# Allegro board autohood_teamschematic_v1.brd
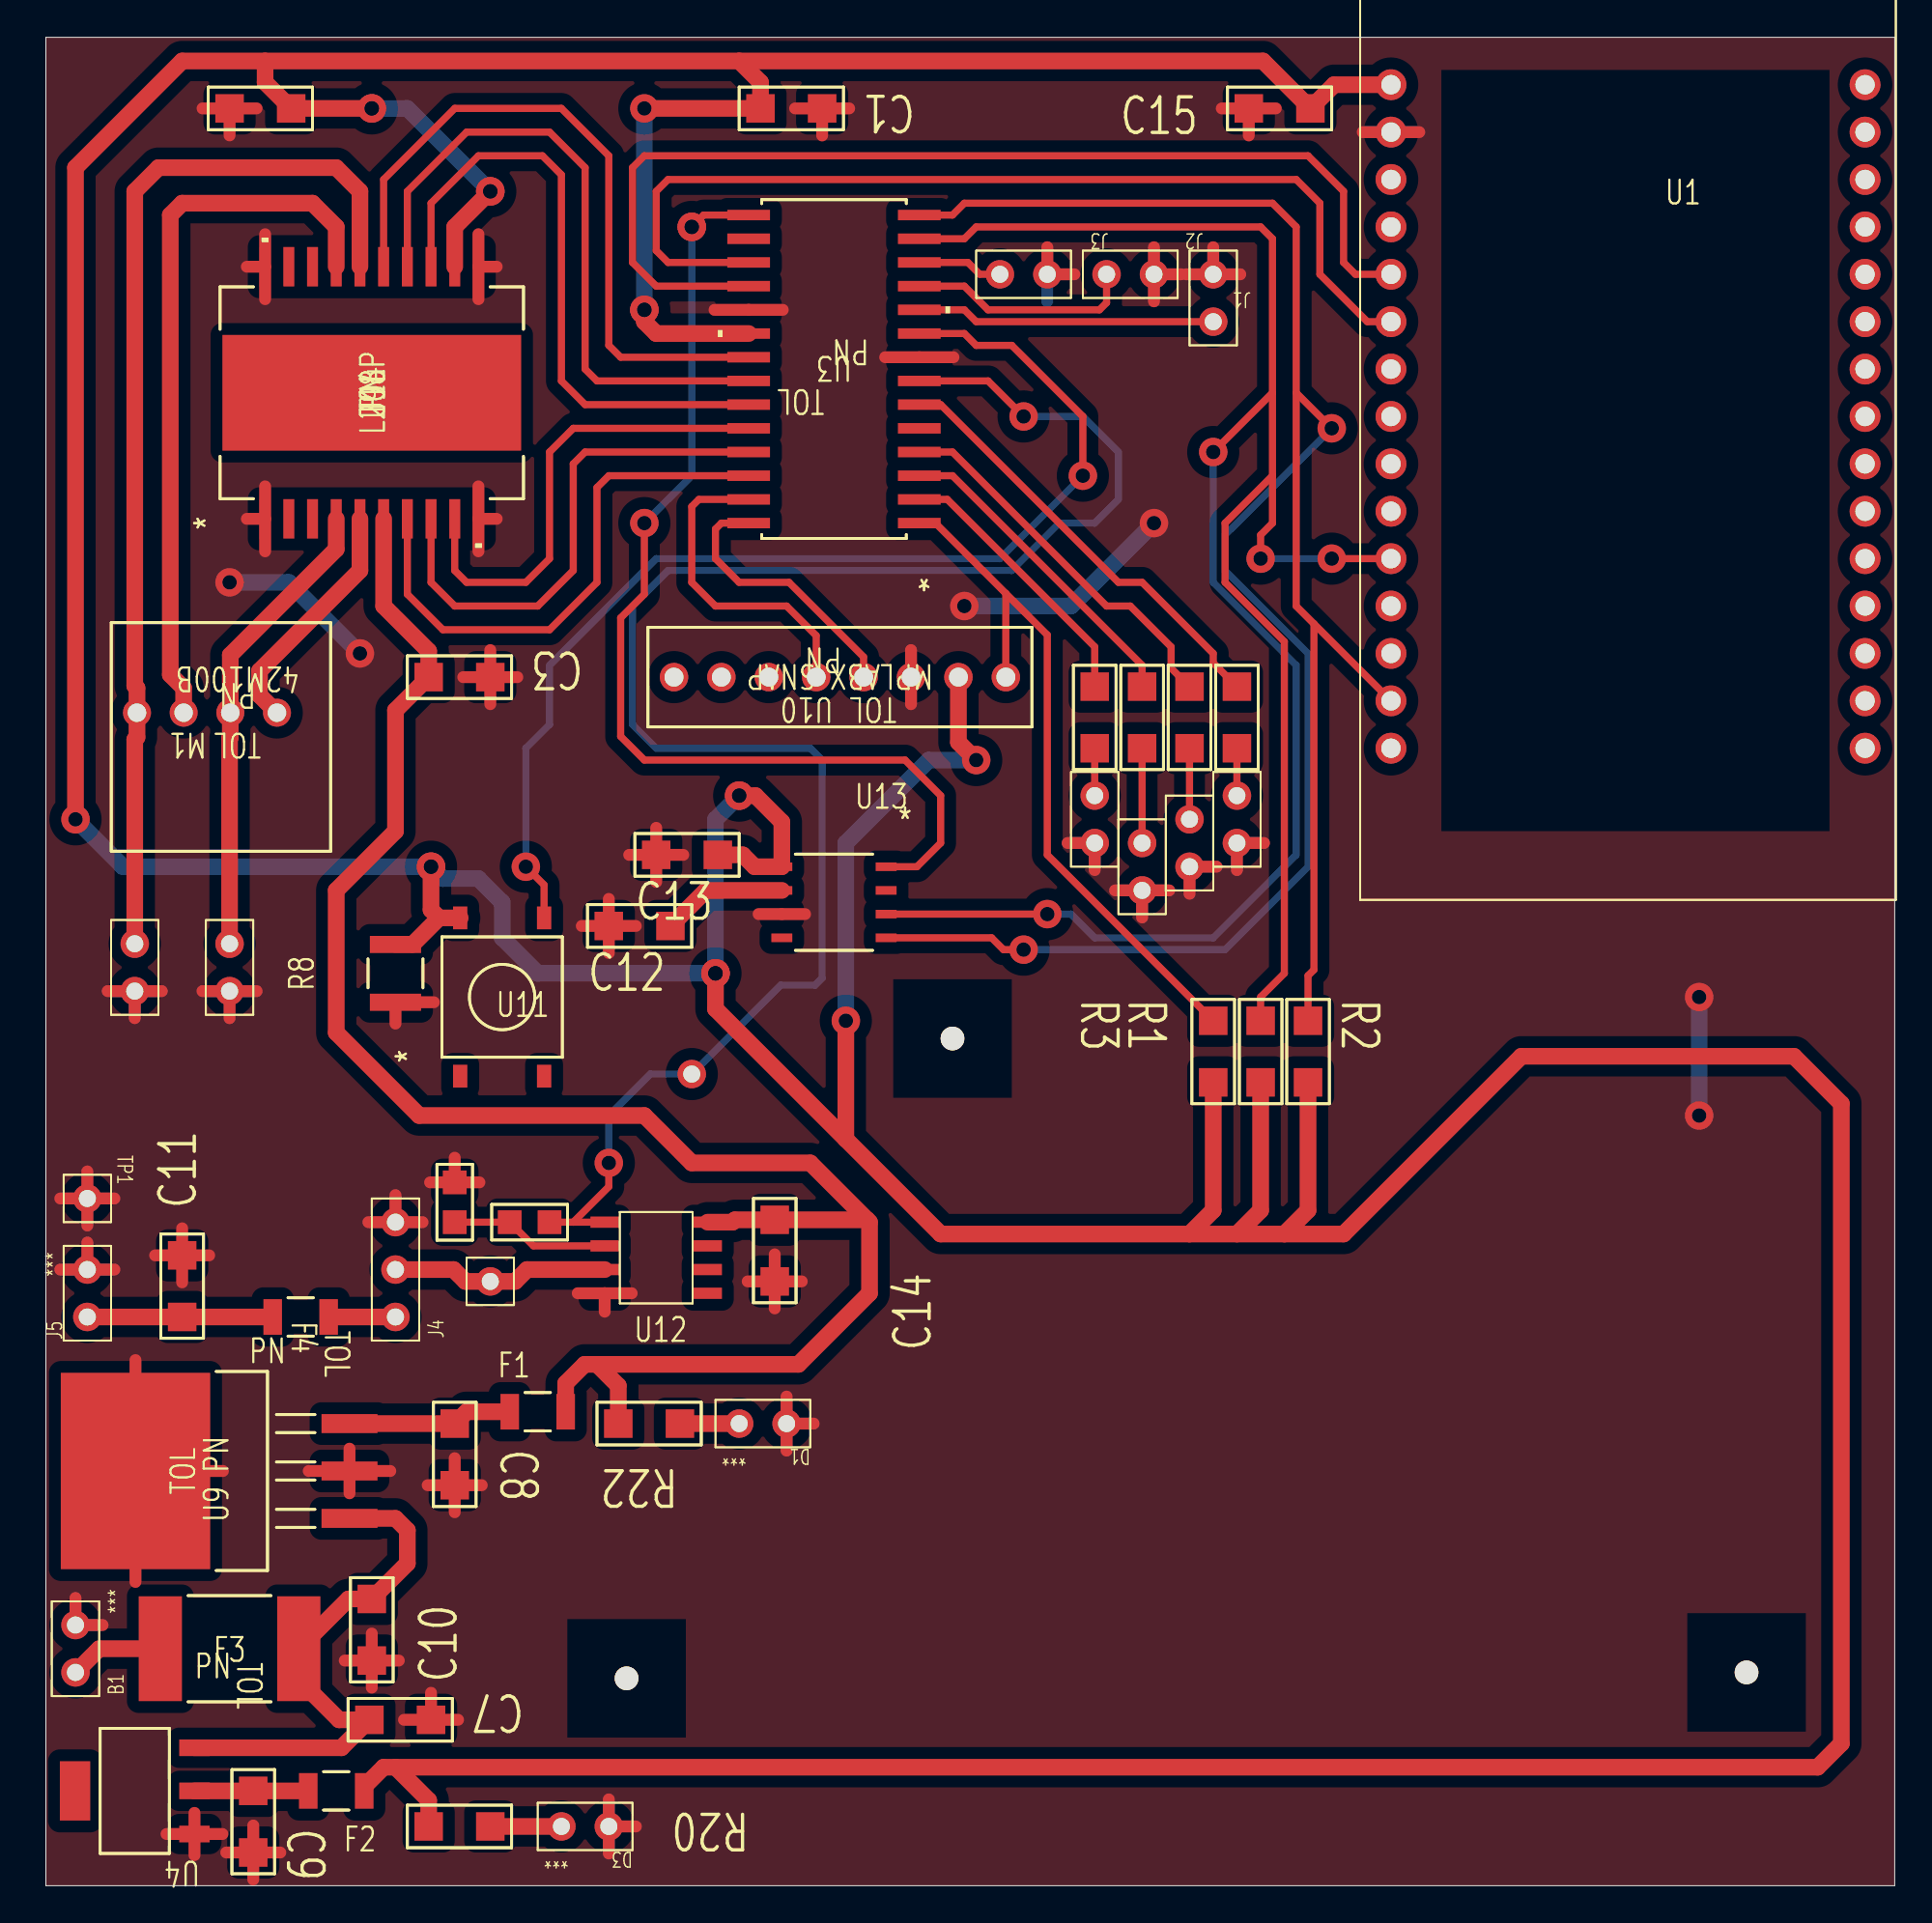
[diagram p0: board, top side]
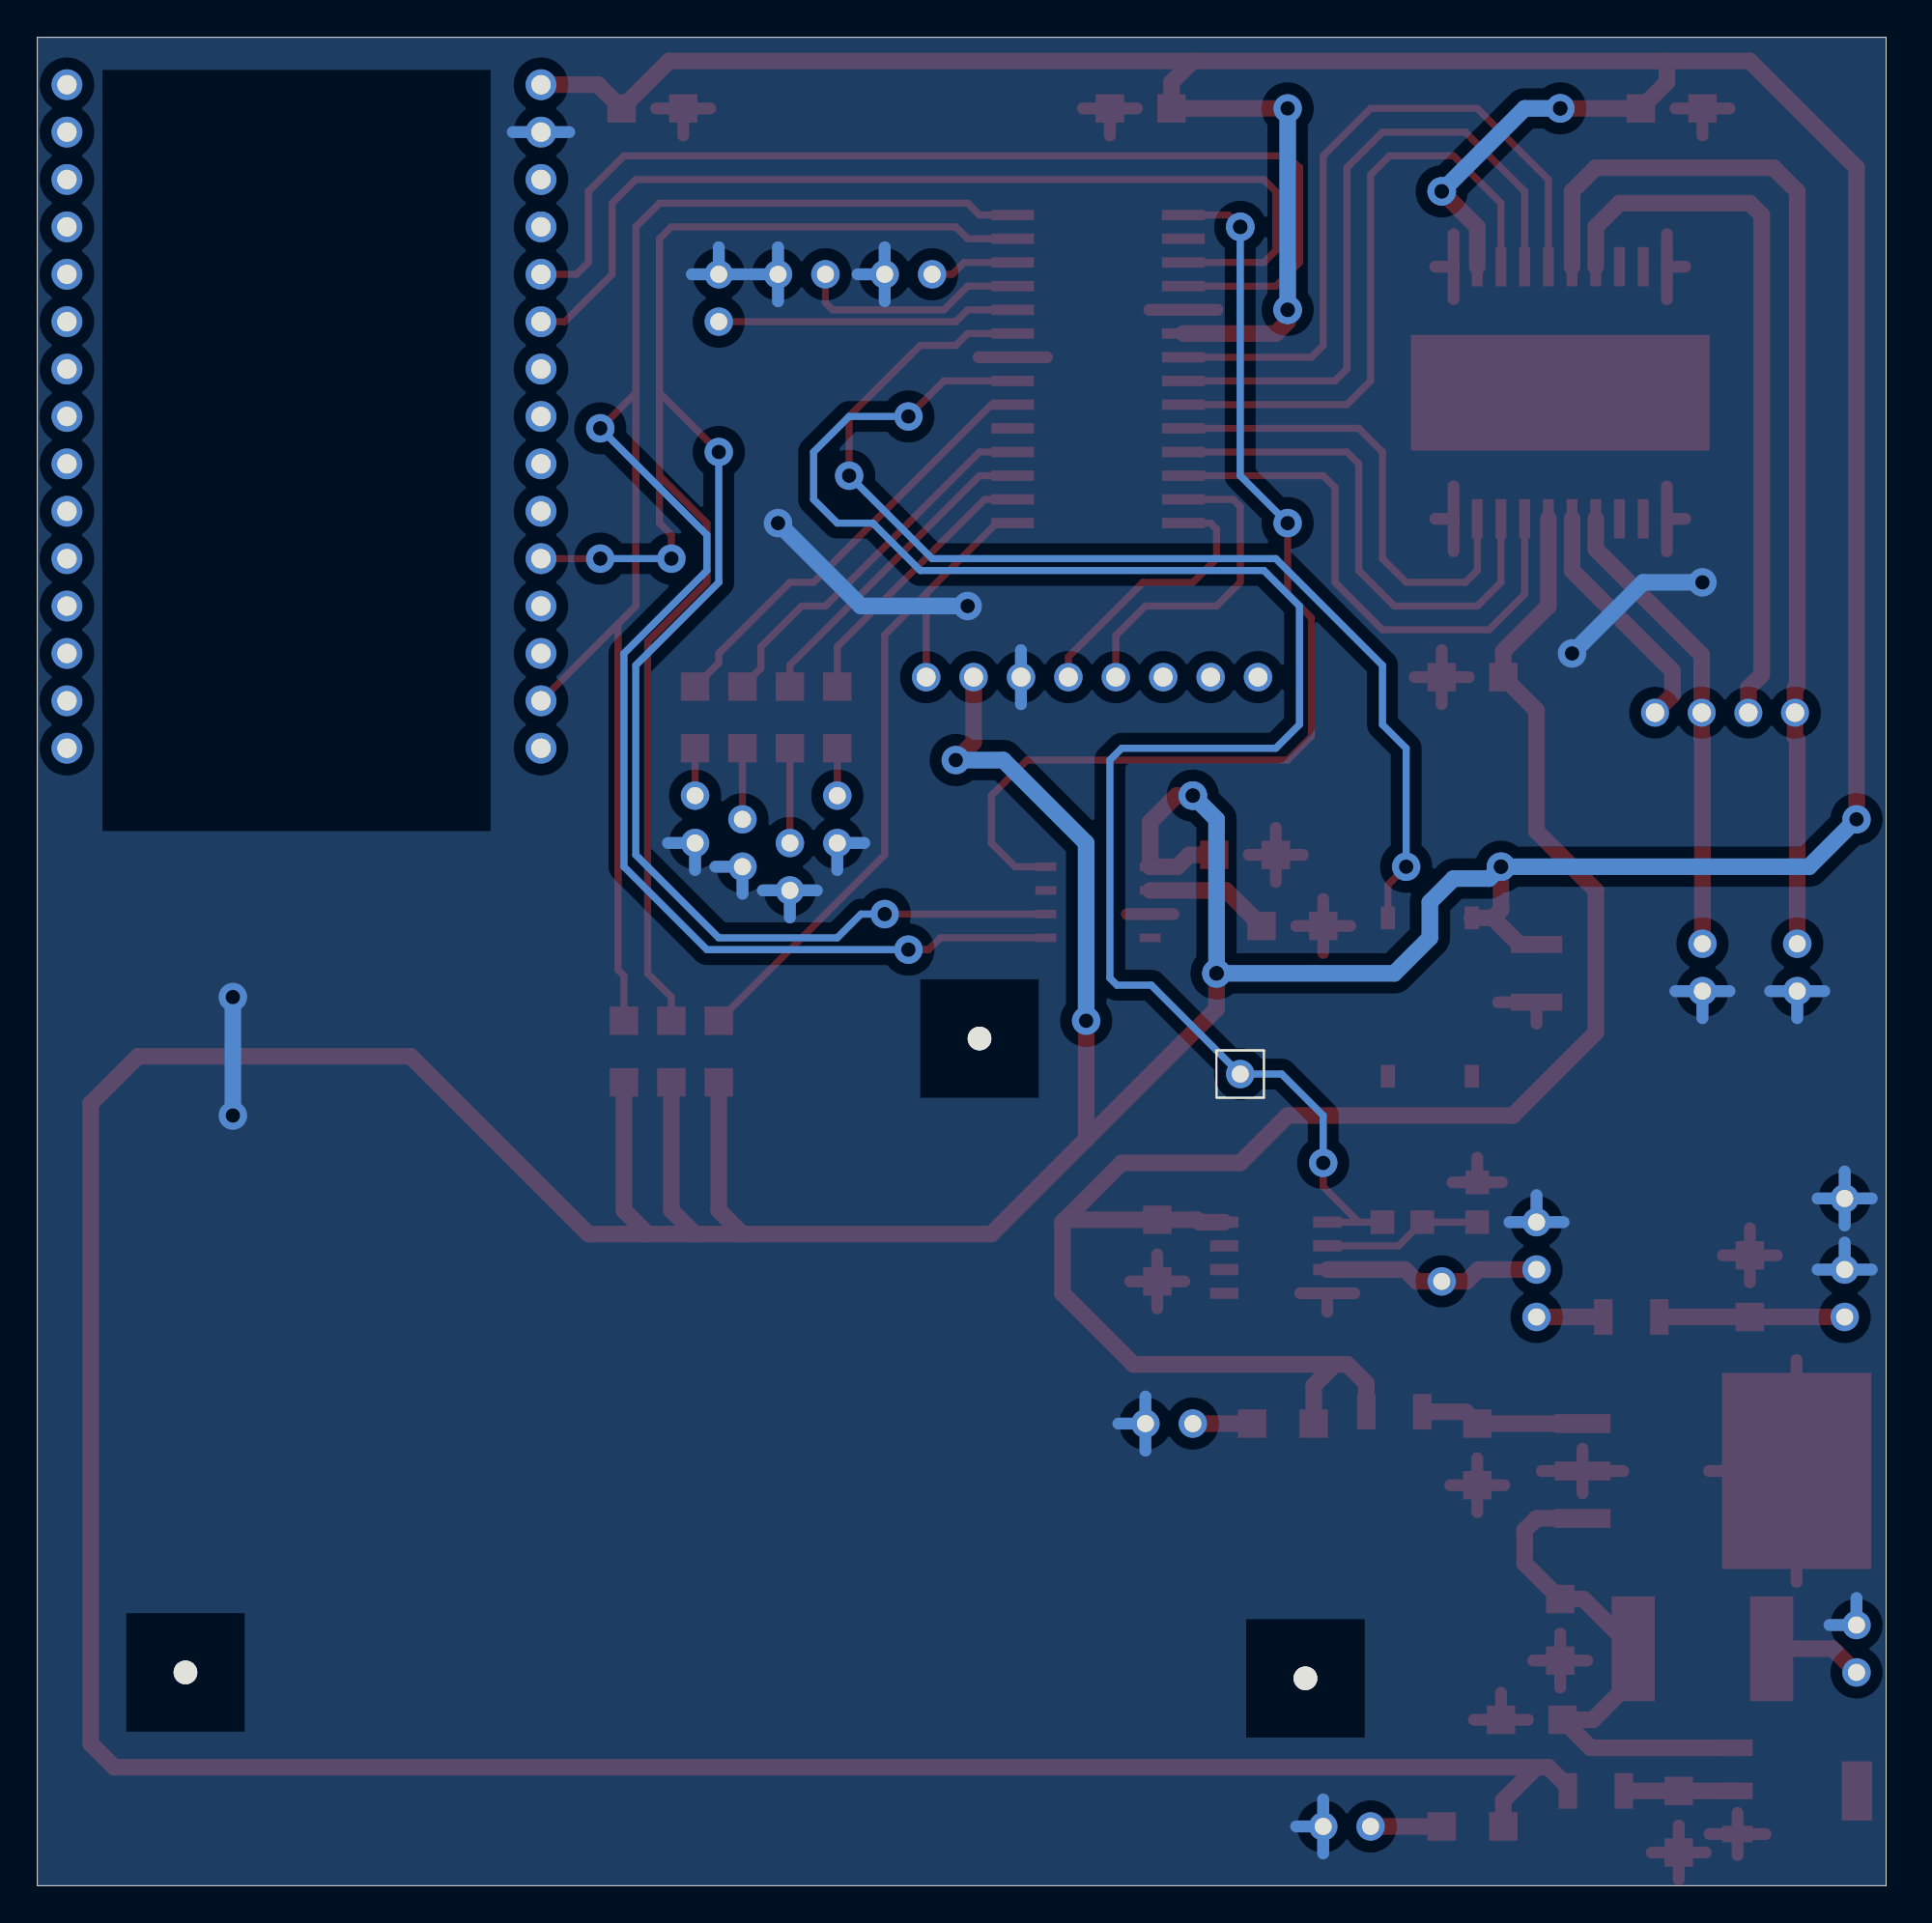
[diagram p1: board, bottom side, seen from below]

Outline 99.06 x 99.06 mm; copper layers: TOP, BOTTOM. Coordinates in mm from the lower left corner of the outline.
Outline path: 0,99.06 0,0 99.06,0 99.06,99.06 0,99.06

## Design rules (mm)
constraint set DEFAULT: min track width 0.127

## Placement (name value [footprint] x y rotation side)
B1  ASR00050  [JUMPER2]  1.59 11.43 90 top
C1  1 uF  [SMC1206]  41.59 95.25 180 top
C3  1 uF  [SMC1206]  23.81 64.77 180 top
C4  1 uF  [SMC1206]  9.84 95.25 0 top
C7  1 uF  [SMC1206]  20.64 8.89 180 top
C8  1 uF  [SMC1206]  21.91 24.76 270 top
C9  1 uF  [SMC1206]  11.11 5.08 270 top
C10  1 uF  [SMC1206]  17.46 12.06 90 top
C11  1 uF  [SMC1206]  7.3 30.48 90 top
C12  0.1uF  [SMC1206]  30.16 51.43 0 top
C13  0.22uF  [SMC1206]  32.7 55.24 0 top
C14  1 uF  [SMC1206]  39.05 32.38 90 top
C15  1 uF  [SMC1206]  64.45 95.25 0 top
D1  LED  [JUMPER2]  39.69 24.76 180 top
D2  LED  [JUMPER2]  63.82 55.88 90 top
D3  LED  [JUMPER2]  30.16 3.17 180 top
D4  LED  [JUMPER2]  56.2 55.88 90 top
D5  LED  [JUMPER2]  58.74 53.34 90 top
D7  LED  [JUMPER2]  61.28 54.61 90 top
D8  DIODE  [JUMPER2]  4.76 50.48 270 top
D9  DIODE  [JUMPER2]  9.84 50.48 270 top
F1  1.5A PTC Fuse  [0ZCJ_BEL]  26.35 25.4 0 top
F2  1.5A PTC Fuse  [0ZCJ_BEL]  15.56 5.08 0 top
F3  2.5A PTC Fuse  [0ZCF_BEL]  9.84 12.7 0 top
F4  1.5A PTC Fuse  [0ZCJ_BEL]  13.65 30.48 0 top
J1  CON2  [JUMPER2]  62.55 86.36 270 top
J2  CON2  [JUMPER2]  59.37 86.36 180 top
J3  CON2  [JUMPER2]  53.66 86.36 180 top
J4  CON3  [JUMPER3]  18.73 30.48 90 top
J5  CON2  [JUMPER2]  2.22 30.48 90 top
M1  42M100B  [CONN_1989764_PXC]  12.38 62.86 180 top
NOREF  -  [unnamed]  31.12 11.11 0 top
NOREF#2  -  [unnamed]  48.58 45.4 0 top
NOREF#3  -  [unnamed]  91.12 11.43 0 top
R1  10k Ohm  [SMC1206]  62.55 46.35 270 top
R2  4.7k Ohm  [SMC1206]  67.63 46.35 270 top
R3  4.7k Ohm  [SMC1206]  65.09 46.35 270 top
R8  10k Ohm  [RES_RN73R2E_KOA-M]  18.73 48.89 90 top
R10  220 Ohm  [SMC1206]  58.74 60.96 90 top
R11  100 Ohm  [SMC0805]  26.99 35.56 180 top
R12  100 Ohm  [SMC0805]  21.91 35.56 90 top
R17  220 Ohm  [SMC1206]  61.28 60.96 90 top
R18  220 Ohm  [SMC1206]  56.2 60.96 90 top
R19  220 Ohm  [SMC1206]  63.82 60.96 90 top
R20  220 Ohm  [SMC1206]  23.81 3.17 180 top
R22  220 Ohm  [SMC1206]  33.97 24.76 180 top
TP1  TEST POINT  [JUMPER1]  2.22 36.83 0 top
TP2  TEST POINT  [JUMPER1]  23.81 32.38 0 top
TP3  TEST POINT  [JUMPER1]  34.61 43.5 180 bottom
U1  ESP32 DEVKIT V1 - DOIT  [ESP32]  84.77 78.74 0 top
U3  PIC18LF26K40-E/SO  [SOIC28-W_MC_MCH-M]  42.23 81.28 180 top
U4  ADP3339AKCZ-3-3-RL  [SOT230P700X180-4N]  4.76 5.08 180 top
U9  LM340T-5/LF01  [SOT_0T-5P0LF01_TEX-M]  7.3 22.22 90 top
U10  MPLABX SNAP  [CONN_PXC08D_SUL]  51.44 63.5 180 top
U11  Button  [HP0315AFKP4-R_NKK]  24.45 47.62 90 top
U12  NCS21911  [NCS21912DR2G]  32.7 33.65 0 top
U13  HIH6130  [IC8_HIH6130-021-001_HNW]  42.23 52.7 0 top
U14  L298P  [POWERSO-20_STM-M]  17.46 80.01 90 top

## Library data of the parts
B1 = ASR00050: User Part Number: ***
C1 C3 C4 C7-C15 = C
D1 D3 = LED: User Part Number: ***
D2 D4 D5 D7 = LED
D8 D9 = DIODE
F1 F2 = FUSE THERMAL
F3 F4 = FUSE THERMAL: User Part Number: PN; Tolerance: TOL
J1-J3 = CON2
J4 = CON3
J5 = CON2: User Part Number: ***
M1 = 42M100B: User Part Number: PN; Tolerance: TOL
R1-R3 R8 R10-R12 R17-R20 R22 = R
TP1-TP3 = TEST POINT
U1 = ESP32 DEVKIT V1 - DOIT
U3 = PIC18F26K40-E/SO: User Part Number: PN; Tolerance: TOL
U4 = ADP3339AKCZ
U9 = LM340T-5-LF01: User Part Number: PN; Tolerance: TOL
U10 = SNAP_CONNECTOR: User Part Number: PN; Tolerance: TOL
U11 = Button
U12 = NCS21911
U13 = HIH6130
U14 = L298P: User Part Number: PN; Tolerance: TOL

## Footprints (pads in the part's own frame, mm; a bottom-side part is the same pattern mirrored in y, then rotated)
0ZCF_BEL
  rect 2.311x5.613 smd: 1(-3.708,0) 2(3.708,0)
0ZCJ_BEL
  rect 0.991x1.905 smd: 1(-1.499,0) 2(1.499,0)
CONN_1989764_PXC
  round 1.499 hole 0.991: 1(0,0) 2(2.5,0) 3(5,0) 4(7.5,0)
CONN_PXC08D_SUL
  round 1.524 hole 1.016: 1(0,-1.27) 2(2.54,-1.27) 3(5.08,-1.27) 4(7.62,-1.27) 5(10.16,-1.27) 6(12.7,-1.27) 7(15.24,-1.27) 8(17.78,-1.27)
ESP32
  round 1.651 hole 1.041: 1(-12.7,17.78) 2(-12.7,15.24) 3(-12.7,12.7) 4(-12.7,10.16) 5(-12.7,7.62) 6(-12.7,5.08) 7(-12.7,2.54) 8(-12.7,0) 9(-12.7,-2.54) 10(-12.7,-5.08) 11(-12.7,-7.62) 12(-12.7,-10.16) 13(-12.7,-12.7) 14(-12.7,-15.24) 15(-12.7,-17.78) 16(12.7,17.78) 17(12.7,-15.24) 18(12.7,-12.7) 19(12.7,-10.16) 20(12.7,-7.62) 21(12.7,-5.08) 22(12.7,-2.54) 23(12.7,0) 24(12.7,2.54) 25(12.7,5.08) 26(12.7,7.62) 27(12.7,10.16) 28(12.7,12.7) 29(12.7,15.24) 30(12.7,-17.78)
HP0315AFKP4-R_NKK
  rect 1.219x0.762 smd: 1(-4.242,2.248) 2(4.242,2.248) 3(-4.242,-2.248) 4(4.242,-2.248)
IC8_HIH6130-021-001_HNW
  rect 1.118x0.457 smd: 1(-2.794,1.905) 2(-2.794,0.635) 3(-2.794,-0.635) 4(-2.794,-1.905) 5(2.794,-1.905) 6(2.794,-0.635) 7(2.794,0.635) 8(2.794,1.905)
JUMPER1
  round 1.524 hole 0.914: 1(0,0)
JUMPER2
  round 1.524 hole 0.914: 1(0,0) 2(2.54,0)
JUMPER3
  round 1.524 hole 0.914: 1(0,0) 2(2.54,0) 3(5.08,0)
NCS21912DR2G
  rect 1.52x0.6 smd: 1(-2.76,1.905) 2(-2.76,0.635) 3(-2.76,-0.635) 4(-2.76,-1.905) 5(2.76,-1.905) 6(2.76,-0.635) 7(2.76,0.635) 8(2.76,1.905)
POWERSO-20_STM-M
  rect 2.108x0.584 smd: 1(-6.756,5.715) 2(-6.756,4.445) 3(-6.756,3.175) 4(-6.756,1.905) 5(-6.756,0.635) 6(-6.756,-0.635) 7(-6.756,-1.905) 8(-6.756,-3.175) 9(-6.756,-4.445) 10(-6.756,-5.715) 11(6.756,-5.715) 12(6.756,-4.445) 13(6.756,-3.175) 14(6.756,-1.905) 15(6.756,-0.635) 16(6.756,0.635) 17(6.756,1.905) 18(6.756,3.175) 19(6.756,4.445) 20(6.756,5.715)
  rect 6.198x16.002 smd: 21(0,0)
RES_RN73R2E_KOA-M
  rect 0.914x2.743 smd: 1(-1.549,0) 2(1.549,0)
SMC0805
  rect 1.27x1.27 smd: 1(0,0) 2(2.134,0)
SMC1206
  rect 1.524x1.524 smd: 1(0,0) 2(3.302,0)
SOIC28-W_MC_MCH-M
  rect 2.286x0.559 smd: 1(-4.572,8.255) 2(-4.572,6.985) 3(-4.572,5.715) 4(-4.572,4.445) 5(-4.572,3.175) 6(-4.572,1.905) 7(-4.572,0.635) 8(-4.572,-0.635) 9(-4.572,-1.905) 10(-4.572,-3.175) 11(-4.572,-4.445) 12(-4.572,-5.715) 13(-4.572,-6.985) 14(-4.572,-8.255) 15(4.572,-8.255) 16(4.572,-6.985) 17(4.572,-5.715) 18(4.572,-4.445) 19(4.572,-3.175) 20(4.572,-1.905) 21(4.572,-0.635) 22(4.572,0.635) 23(4.572,1.905) 24(4.572,3.175) 25(4.572,4.445) 26(4.572,5.715) 27(4.572,6.985) 28(4.572,8.255)
SOT230P700X180-4N
  rect 1.626x0.889 smd: 1(-3.2,2.311) 2(-3.2,0) 3(-3.2,-2.311)
  rect 1.626x3.175 smd: 4(3.2,0)
SOT_0T-5P0LF01_TEX-M
  rect 1.016x2.997 smd: 1(-2.54,-8.966) 2(0,-8.966) 3(2.54,-8.966)
  rect 10.516x8.001 smd: 4(0,2.502)
unnamed
  round 1.27 hole 3.962 unplated: (0,0)

## Nets
3V3: C1.2 C4.2 C13.2 C15.2 F2.2 R1.2 R2.2 R3.2 R8.2 R20.2 U1.1 U3.20 U10.2(VDD) U11.2 U13.1 U14.12(VSS)
3V3_FUSE: C9.1 F2.1 U4.2(OUT1)
5V: C3.2 C14.2 F1.2 R22.2 U12.8 U14.6
5V_FUSE: C8.1 F1.1 U9.3(OUT)
9V: F4.2 J4.1
GND: B1.2 C1.1 C3.1 C4.1 C7.1 C8.2 C9.2 C10.1 C11.2 C12.1 C13.1 C14.1 C15.1 D1.1(CATHODE) D2.1(CATHODE) D3.1(CATHODE) D4.1(CATHODE) D5.1(CATHODE) D7.1(CATHODE) D8.2 D9.2 J1.1 J2.1 J3.1 J4.3 J5.2 R8.1 R12.2 TP1.1 U1.2 U3.8 U3.19(VSS1) U4.1 U9.2 U9.4 U10.3 U12.4(VSS) U13.3(VSS) U14.1 U14.10 U14.11 U14.20
AMP: R11.1 TP3.1 U3.7 U12.1
ANEM: J4.2 TP2.1 U12.3
ANEM_LED: R10.2 U3.3
BATTERY: C7.2 C10.2 F3.2 U4.3 U9.1
BTN_IN: U3.9 U11.4
COIL_1_IN: D9.1(K) M1.2 U14.4
COIL_1_OUT: M1.1 U14.5
COIL_2_IN: D8.1(K) M1.4(OUT_2) U14.16
COIL_2_OUT: M1.3 U14.17
ENABLEA: U3.25 U14.8
ENABLEB: U3.22 U14.14
ESP32RX: U1.5 U3.18
ESP32TX: U1.6 U3.17
HU_INTERR: U3.15 U13.8
HUMIDITY_LED: R17.2 U3.4
INPUT1A: U3.26 U14.7
INPUT1B: U3.23 U14.13
INPUT2A: U3.24 U14.9
INPUT2B: U3.21 U14.15
LED: R18.2 U3.2
MCLR: R1.1 U3.1 U10.1
PGC: U3.27 U10.5
PGD: U3.28 U10.4
SCL: R2.1 U1.14 U3.14 U13.5
SDA: R3.1 U1.11 U3.13 U13.6
STEP_LED: R19.2 U3.6
XTRAGPIO: J1.2 U3.10
XTRAGPIO1: J2.2 U3.11
XTRAGPIO2: J3.2 U3.12
N05422: D2.2 R19.1
N05426: D3.2 R20.1
N06741: D4.2 R18.1
N07629: C11.1 F4.1 J5.1
N08087: D5.2 R10.1
N08305: R11.2 R12.1 U12.2
N08985: C12.2 U13.2
N09403: D7.2 R17.1
N39972: D1.2 R22.1
N042400: B1.1(VC) F3.1

Pads without a net: U1 3 4 7 8 9 10 12 13 15 16 17 18 19 20 21 22 23 24 25 26 27 28 29 30; U3 5 16; U4 4; U10 6 7 8; U11 1 3; U12 5 6 7; U13 4 7; U14 2 3 18 19 21

## Via types
v1: diameter 1.524, hole 0.775, TOP to BOTTOM, 36 vias

## Routing (per net, layer and track width the routed paths; a pad name or vN(x,y) marks a point on that pad's centre or on a via; arc(x,y) is an arc through that point)
3V3: length 467.4
  TOP w0.889: 37.15,97.79 65.21,97.79 C15.2 69.02,96.52 U1.1 ; 37.15,97.79 38.29,96.65 C1.2 v1(32.07,95.25) ; 37.15,97.79 11.75,97.79 ; C13.2 37.34,55.24 37.97,54.61 39.43,54.61 39.43,57.01 38.02,58.42 v1(37.15,58.42) ; 63.82,34.92 65.09,36.19 R3.2 ; 63.82,34.92 66.36,34.92 ; 63.82,34.92 61.28,34.92 ; 18.73,6.35 18.1,6.35 17.06,5.31 F2.2 ; 18.73,6.35 94.93,6.35 96.2,7.62 96.2,41.91 93.66,44.45 79.06,44.45 69.53,34.92 66.36,34.92 ; 18.73,6.35 20.51,4.57 R20.2 ; U3.20 32.7,83.18 32.07,83.82 v1(32.07,84.45) ; U10.2 48.89,61.28 v1(49.85,60.32) ; R2.2 67.63,36.19 66.36,34.92 ; U11.2 21.07,51.87 ; 21.07,51.87 20.64,52.3 v1(20.64,54.61) ; 21.07,51.87 19.65,50.44 R8.2 ; v1(35.88,48.89) 35.88,46.99 42.86,40 ; v1(23.81,90.8) 21.91,88.9 U14.12 ; 61.28,34.92 62.55,36.19 R1.2 ; 61.28,34.92 47.94,34.92 42.86,40 ; 11.75,97.79 7.3,97.79 1.59,92.07 v1(1.59,57.15) ; 11.75,97.79 11.75,96.65 C4.2 v1(17.46,95.25) ; 42.86,40 v1(42.86,46.35)
  BOTTOM w0.889: v1(49.85,60.32) 47.31,60.32 42.86,55.88 v1(42.86,46.35) ; v1(23.81,90.8) 19.37,95.25 v1(17.46,95.25) ; v1(1.59,57.15) 4.13,54.61 v1(20.64,54.61) 21.27,53.97 23.18,53.97 24.45,52.7 24.45,50.8 26.35,48.89 v1(35.88,48.89) 35.88,57.15 v1(37.15,58.42) ; v1(32.07,84.45) v1(32.07,95.25)
3V3_FUSE: length 6.1
  TOP w0.889: F2.1 C9.1 U4.2
5V: length 99.2
  TOP w0.889: 44.01,35.69 40.96,38.73 34.61,38.73 32.07,41.27 20,41.27 15.56,45.72 15.56,53.34 18.73,56.51 18.73,62.99 C3.2 20.51,66.17 18.1,68.58 U14.6 ; 44.01,35.69 C14.2 36.92,35.69 36.79,35.56 U12.8 ; 44.01,35.69 44.13,35.56 44.13,31.75 40.32,27.94 29.53,27.94 ; 29.53,27.94 28.87,27.94 27.85,26.92 F1.2 ; 29.53,27.94 30.67,26.8 R22.2
5V_FUSE: length 8.8
  TOP w0.889: U9.3 C8.1 22.54,25.4 F1.1
9V: length 3.6
  TOP w0.889: J4.1 F4.2
GND: length 290
  TOP w0.635: 0.77,36.83 TP1.1 ; TP1.1 3.67,36.83 ; TP1.1 2.22,38.28 ; TP1.1 2.22,35.38 ; C7.1 20.64,10.34 ; C7.1 22.09,8.89 ; C7.1 19.19,8.89 ; 9.66,1.78 C9.2 ; C9.2 12.56,1.78 ; C9.2 11.11,3.23 ; C9.2 11.11,0.33 ; 9.84,93.8 C4.1 ; C4.1 11.29,95.25 ; C4.1 8.39,95.25 ; 7.3,32.33 C11.2 ; C11.2 5.85,33.78 ; C11.2 7.3,35.23 ; C11.2 8.75,33.78 ; D3.1 31.61,3.17 ; D3.1 30.16,4.62 ; D3.1 30.16,1.73 ; 39.69,23.32 D1.1 ; D1.1 39.69,26.21 ; D1.1 41.14,24.76 ; U9.4 4.8,28.17 ; U9.4 9.49,22.22 ; U9.4 4.8,16.28 ; C15.1 65.9,95.25 ; C15.1 63,95.25 ; C15.1 64.45,93.8 ; 56.2,54.43 D4.1 54.75,55.88 ; 21.91,20.01 C8.2 ; C8.2 21.91,22.91 ; C8.2 20.46,21.46 ; C8.2 23.36,21.46 ; 11.75,71.51 U14.1 ; U14.1 11.75,74.99 ; U14.1 10.77,73.25 ; 53.66,87.81 J3.1 55.11,86.36 ; C10.1 18.91,12.06 ; C10.1 16.01,12.06 ; C10.1 17.46,10.62 ; C10.1 17.46,13.51 ; U14.10 23.18,74.99 ; U14.10 23.18,71.51 ; U14.10 24.16,73.25 ; C1.1 43.04,95.25 ; C1.1 41.59,93.8 ; C1.1 40.14,95.25 ; 7.96,1.64 U4.1 ; U4.1 6.46,2.77 ; U4.1 9.46,2.77 ; U4.1 7.96,3.9 ; 61.28,53.16 D7.1 62.73,54.61 ; 20.79,47.35 R8.1 18.73,46.2 ; D9.2 11.29,47.94 ; D9.2 8.39,47.94 ; D9.2 9.84,46.49 ; 10.77,86.77 U14.20 ; U14.20 11.75,85.03 ; U14.20 11.75,88.51 ; 32.7,53.8 C13.1 ; C13.1 31.25,55.24 ; C13.1 32.7,56.69 ; C13.1 34.15,55.24 ; J5.2 2.22,34.47 ; J5.2 3.67,33.02 ; J5.2 0.77,33.02 ; J4.3 20.18,35.56 ; J4.3 17.28,35.56 ; J4.3 18.73,37.01 ; C3.1 23.81,66.22 ; C3.1 23.81,63.32 ; C3.1 25.26,64.77 ; C3.1 22.36,64.77 ; 59.37,84.91 J2.1 ; J2.1 60.82,86.36 ; J2.1 59.37,87.81 ; 14.08,22.22 U9.2 ; U9.2 18.45,22.22 ; U9.2 16.27,23.42 ; U9.2 16.27,21.03 ; 63.82,54.43 D2.1 65.27,55.88 ; R12.2 21.91,39.01 ; R12.2 20.59,37.69 ; R12.2 23.23,37.69 ; 70.56,93.98 U1.2 73.58,93.98 ; 1.59,15.42 B1.2 3.04,13.97 ; 39.48,84.45 U3.19 35.83,84.45 ; J1.1 62.55,87.81 ; J1.1 64,86.36 ; J1.1 61.1,86.36 ; 48.63,81.91 U3.8 44.97,81.91 ; 23.18,85.03 U14.11 ; U14.11 23.18,88.51 ; U14.11 24.16,86.77 ; 28.5,31.75 U12.4 ; U12.4 29.94,30.76 ; U12.4 31.39,31.75 ; 3.31,47.94 D8.2 ; D8.2 6.21,47.94 ; D8.2 4.76,46.49 ; C14.1 39.05,33.83 ; C14.1 37.6,32.38 ; C14.1 40.5,32.38 ; C14.1 39.05,30.94 ; 30.16,49.99 C12.1 ; C12.1 28.71,51.43 ; C12.1 30.16,52.88 ; C12.1 31.61,51.43 ; 57.29,53.34 D5.1 ; D5.1 60.19,53.34 ; D5.1 58.74,51.89 ; 38.19,52.07 40.68,52.07 ; 46.36,63.32 U10.3 46.36,66.22
  BOTTOM w0.635: D1.1 39.69,26.21 ; D1.1 41.14,24.76 ; D1.1 39.69,23.32 ; 57.29,53.34 D5.1 ; D5.1 58.74,51.89 ; D5.1 60.19,53.34 ; 65.27,55.88 D2.1 63.82,54.43 ; 59.37,84.91 J2.1 ; J2.1 60.82,86.36 ; J2.1 59.37,87.81 ; J4.3 18.73,37.01 ; J4.3 17.28,35.56 ; J4.3 20.18,35.56 ; 73.58,93.98 U1.2 70.56,93.98 ; 9.84,46.49 D9.2 ; D9.2 11.29,47.94 ; D9.2 8.39,47.94 ; 3.04,13.97 B1.2 1.59,15.42 ; 0.77,33.02 J5.2 ; J5.2 2.22,34.47 ; J5.2 3.67,33.02 ; J3.1 53.66,87.81 ; J3.1 53.66,84.91 ; J3.1 55.11,86.36 ; 56.2,54.43 D4.1 54.75,55.88 ; D3.1 31.61,3.17 ; D3.1 30.16,1.73 ; D3.1 30.16,4.62 ; J1.1 62.55,87.81 ; J1.1 64,86.36 ; J1.1 61.1,86.36 ; 61.28,53.16 D7.1 62.73,54.61 ; TP1.1 2.22,38.28 ; TP1.1 3.67,36.83 ; TP1.1 0.77,36.83 ; TP1.1 2.22,35.38 ; 4.76,46.49 D8.2 ; D8.2 3.31,47.94 ; D8.2 6.21,47.94 ; 46.36,63.32 U10.3 46.36,66.22
  BOTTOM w0.889: v1(59.37,73.02) 54.93,68.58 v1(49.21,68.58) ; v1(9.84,69.85) 13.02,69.85 v1(16.83,66.04) ; v1(88.58,41.27) v1(88.58,47.62)
AMP: length 96.1
  TOP w0.381: U3.7 50.48,80.64 v1(52.39,78.74) ; v1(30.16,38.73) 30.16,37.46 28.26,35.56 ; 28.26,35.56 R11.1 ; 28.26,35.56 U12.1
  BOTTOM w0.381: v1(30.16,38.73) 30.16,41.27 32.39,43.5 TP3.1 39.37,48.26 41.21,48.26 41.59,48.64 41.59,60.32 40.96,60.96 32.7,60.96 31.43,62.23 31.43,68.58 33.34,70.48 51.75,70.48 54.29,73.02 56.2,73.02 57.47,74.29 57.47,76.83 55.56,78.74 v1(52.39,78.74)
ANEM: length 11.7
  TOP w0.889: U12.3 25.78,33.02 25.15,32.38 TP2.1 22.48,32.38 21.84,33.02 J4.2
ANEM_LED: length 17.3
  TOP w0.381: U3.3 48.58,75.56 58.74,65.4 R10.2
BATTERY: length 29.2
  TOP w0.889: U4.3 15.84,7.39 17.34,8.89 15.71,8.89 13.55,11.05 F3.2 16.22,15.37 C10.2 19.37,17.27 19.37,19.05 18.73,19.68 U9.1
BTN_IN: length 61
  TOP w0.381: v1(25.72,54.61) 26.7,53.63 U11.4 ; v1(55.56,75.56) 55.56,78.74 51.75,82.55 49.85,82.55 49.21,83.18 U3.9
  BOTTOM w0.381: v1(25.72,54.61) 25.72,60.96 26.99,62.23 26.99,65.4 32.7,71.12 51.12,71.12 v1(55.56,75.56)
COIL_1_IN: length 25.1
  TOP w0.889: D9.1 9.84,61.5 9.88,61.54 M1.2 9.88,65.95 15.56,71.63 U14.4
COIL_1_OUT: length 13
  TOP w0.889: U14.5 16.83,70.48 11.45,65.11 11.45,63.8 M1.1
COIL_2_IN: length 57.6
  TOP w0.889: D8.1 4.76,61.42 4.88,61.54 M1.4 4.88,64.19 4.76,64.31 4.76,90.8 6.03,92.07 15.56,92.07 16.83,90.8 U14.16
COIL_2_OUT: length 38.8
  TOP w0.889: M1.3 7.38,64.19 6.67,64.9 6.67,89.53 7.3,90.17 14.29,90.17 15.56,88.9 U14.17
ENABLEA: length 27.7
  TOP w0.381: U3.25 28.89,76.83 28.26,76.2 28.26,70.48 26.35,68.58 21.91,68.58 20.64,69.85 U14.8
ENABLEB: length 35.5
  TOP w0.381: U14.14 19.37,90.8 22.54,93.98 26.99,93.98 28.89,92.07 28.89,81.28 29.53,80.64 U3.22
ESP32RX: length 57.6
  TOP w0.381: U1.5 70.17,86.36 69.53,86.99 69.53,90.8 67.63,92.71 32.07,92.71 31.43,92.07 31.43,86.99 32.7,85.72 U3.18
ESP32TX: length 53.4
  TOP w0.381: U3.17 33.34,86.99 32.7,87.63 32.7,90.8 33.34,91.44 66.99,91.44 68.26,90.17 68.26,86.36 70.8,83.82 U1.6
HU_INTERR: length 56.6
  TOP w0.381: U13.8 46.67,54.61 47.94,55.88 47.94,58.42 46.04,60.32 32.07,60.32 30.8,61.59 30.8,67.94 32.07,69.21 v1(32.07,73.02) ; U3.15 35.24,89.53 v1(34.61,88.9)
  BOTTOM w0.381: v1(34.61,88.9) 34.61,75.56 v1(32.07,73.02)
HUMIDITY_LED: length 20.4
  TOP w0.381: R17.2 60.29,65.25 60.29,66.39 58.1,68.58 56.83,68.58 48.58,76.83 U3.4
INPUT1A: length 29.5
  TOP w0.381: U3.26 30.16,75.56 29.53,74.93 29.53,69.85 26.99,67.31 21.27,67.31 19.37,69.21 U14.7
INPUT1B: length 33.5
  TOP w0.381: U14.13 20.64,90.17 23.18,92.71 26.61,92.71 27.62,91.69 27.62,80.64 28.89,79.38 U3.23
INPUT2A: length 25.5
  TOP w0.381: U3.24 28.26,78.1 26.99,76.83 26.99,71.12 25.72,69.85 22.54,69.85 21.91,70.48 U14.9
INPUT2B: length 37.3
  TOP w0.381: U14.15 18.1,91.44 21.91,95.25 27.62,95.25 30.16,92.71 30.16,82.55 30.8,81.91 U3.21
LED: length 14.8
  TOP w0.381: R18.2 56.2,66.4 48.3,74.29 U3.2
MCLR: length 38.2
  TOP w0.381: 51.44,69.25 47.66,73.02 U3.1 ; 51.44,69.25 U10.1 ; 51.44,69.25 53.66,67.03 53.66,55.24 R1.1
PGC: length 17.3
  TOP w0.381: U3.27 34.99,74.29 34.61,73.91 34.61,69.85 35.88,68.58 39.69,68.58 41.28,66.99 U10.5
PGD: length 14.7
  TOP w0.381: U10.4 43.81,65.85 39.81,69.85 37.15,69.85 35.88,71.12 35.88,72.71 36.19,73.02 U3.28
SCL: length 125
  TOP w0.381: U13.5 50.67,50.8 51.31,50.16 v1(52.39,50.16) ; R2.1 67.63,48.77 67.94,49.09 67.94,67.63 ; v1(68.9,78.1) 66.99,80.01 ; 66.99,80.01 66.99,68.58 67.94,67.63 ; 66.99,80.01 66.99,88.9 65.72,90.17 49.21,90.17 48.58,89.53 U3.14 ; 67.94,67.63 U1.14
  BOTTOM w0.381: v1(68.9,78.1) 63.18,72.39 63.18,70.48 67.63,66.04 67.63,54.61 63.18,50.16 v1(52.39,50.16)
SDA: length 128.2
  TOP w0.381: R3.1 65.09,47.62 66.36,48.89 66.36,66.67 63.18,69.85 63.18,73.02 65.72,75.56 ; U1.11 v1(68.9,71.12) ; U13.6 v1(53.66,52.07) ; v1(65.09,71.12) 65.09,72.39 65.72,73.02 65.72,75.56 ; 65.72,75.56 65.72,80.01 ; v1(62.55,76.83) 65.72,80.01 ; 65.72,80.01 65.72,88.26 65.09,88.9 49.85,88.9 49.21,88.26 U3.13
  BOTTOM w0.381: v1(53.66,52.07) 54.93,52.07 56.2,50.8 62.55,50.8 66.99,55.24 66.99,65.4 62.55,69.85 v1(62.55,76.83) ; v1(68.9,71.12) v1(65.09,71.12)
STEP_LED: length 23.6
  TOP w0.381: R19.2 62.55,65.53 62.55,66.04 58.74,69.85 57.47,69.85 47.94,79.38 U3.6
XTRAGPIO: length 16
  TOP w0.381: U3.10 49.21,84.45 49.85,83.82 J1.2
XTRAGPIO1: length 12.2
  TOP w0.381: U3.11 49.21,85.72 50.48,84.45 56.45,84.45 56.83,84.84 J2.2
XTRAGPIO2: length 4.6
  TOP w0.381: J3.2 50.04,86.36 49.4,86.99 U3.12
N05422: length 2.5
  TOP w0.381: D2.2 R19.1
N05426: length 3.8
  TOP w0.889: D3.2 R20.1
N06741: length 2.5
  TOP w0.381: R18.1 D4.2
N07629: length 9.9
  TOP w0.889: F4.1 C11.1 J5.1
N08087: length 5.1
  TOP w0.381: D5.2 R10.1
N08305: length 8.6
  TOP w0.381: U12.2 26.12,34.29 R11.2 R12.1
N08985: length 6.8
  TOP w0.889: 39.43,53.34 35.37,53.34 C12.2
N09403: length 3.8
  TOP w0.381: D7.2 R17.1
N39972: length 3.2
  TOP w0.889: D1.2 R22.1
N042400: length 5.1
  TOP w0.889: F3.1 2.86,12.7 B1.1

## Copper pours and planes (outline as drawn; the poured copper is in the pictures)
GND on TOP: 99.06,0 99.06,99.06 0,99.06 0,0 ; 1 cut-out
GND on BOTTOM: 0,99.06 0,0 99.06,0 99.06,99.06 ; 1 cut-out
